# Altium PCB V_4.PcbDoc
Units mm, origin at the board's own origin, x right, y up, seen from the top; angles counter-clockwise.
Board outline 70 x 20 mm, 3 copper layers (Top Layer, GND, Bottom Layer), stack 0.488 mm thick; 4 components, 5 nets, 70 pads, 29 vias.
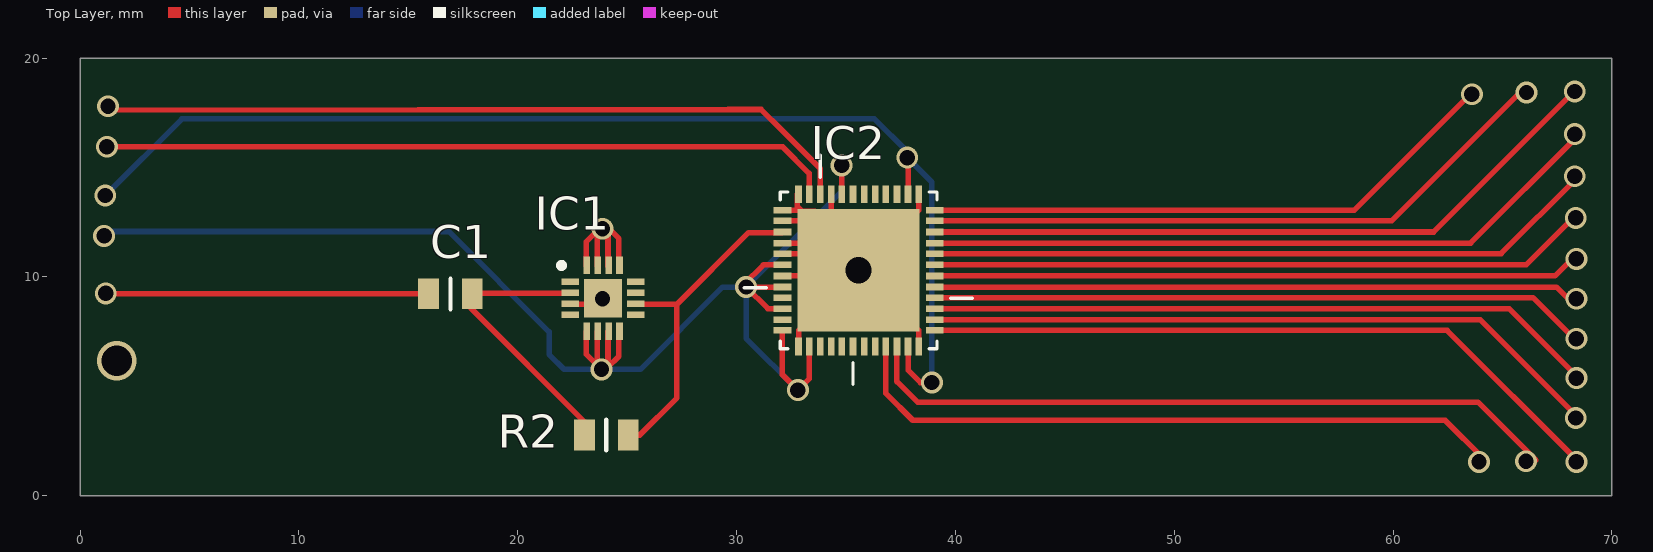
[diagram p0: Top Layer view]
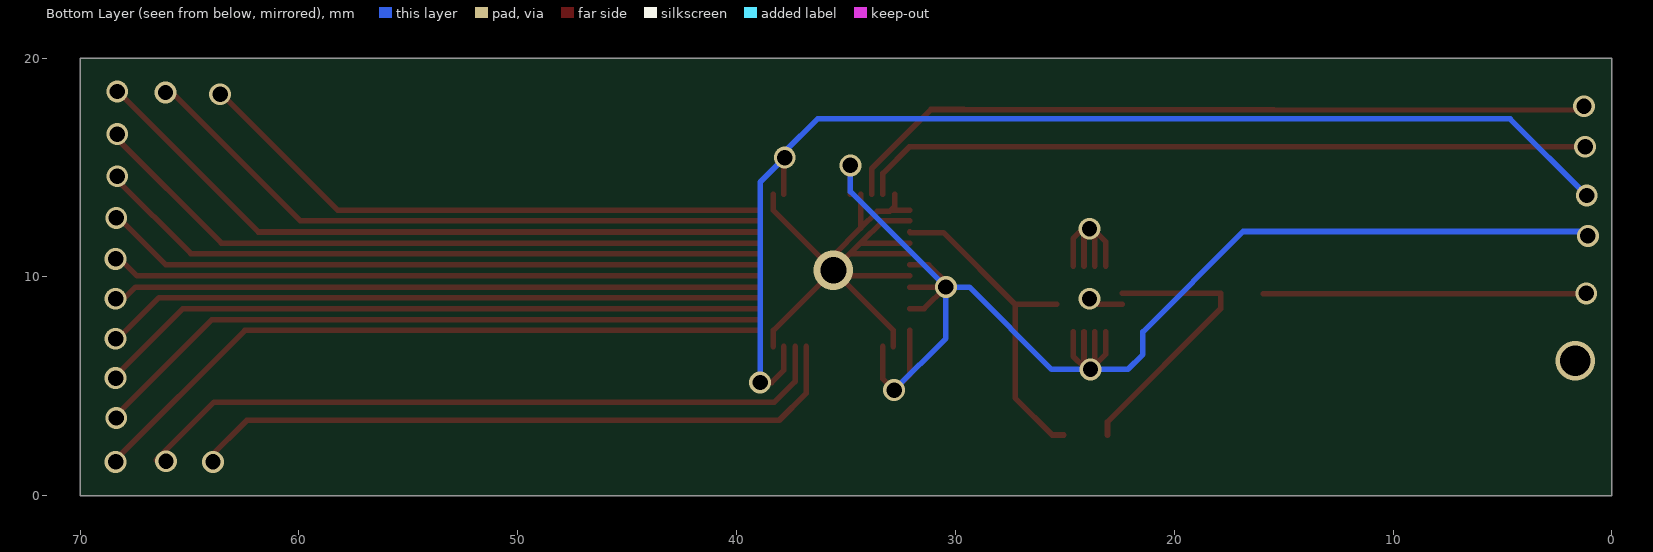
[diagram p1: Bottom Layer view, seen from below]
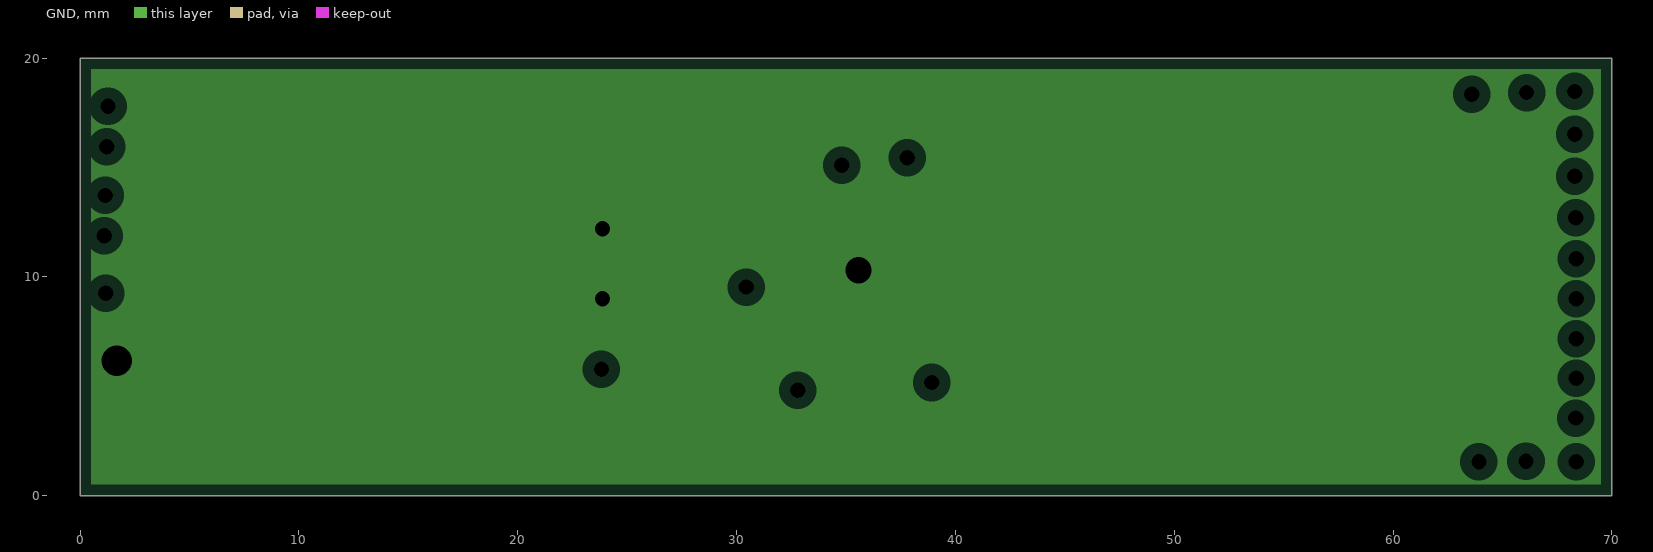
[diagram p2: GND, clearances drawn from the general rule]
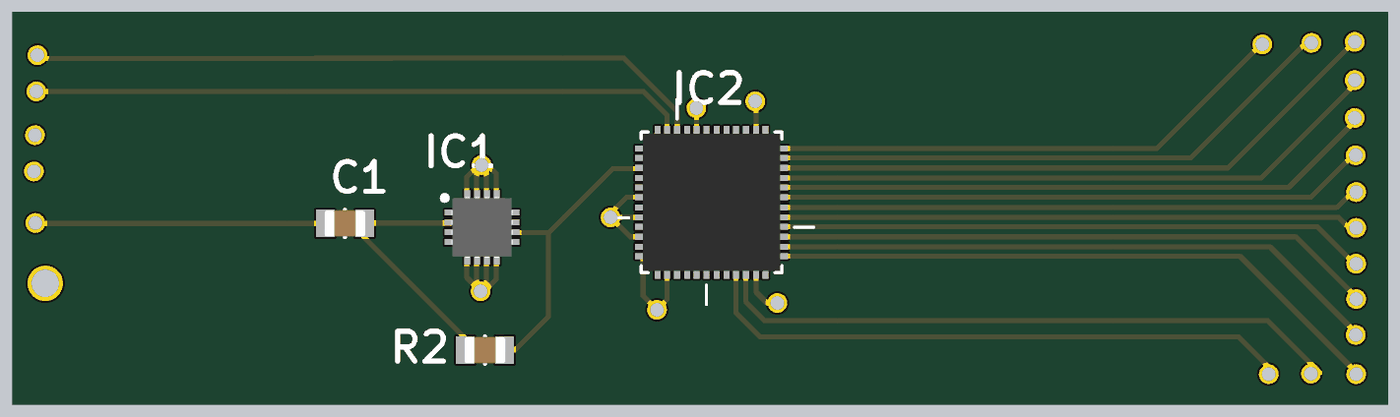
[diagram p3: 3D render of the assembled board from above, using the file's embedded part models]

## Layer stack, top to bottom
Top Solder: solder mask 0.0102, Solder Resist, Dk 3.5
Top Layer: signal copper 0.0356
Dielectric1: core 0.254, FR-4, Dk 4.2
GND: plane copper 0.036, net GND
Dielectric 2: prepreg 0.127, Dk 4.2
Bottom Layer: signal copper 0.0356
Bottom Solder: solder mask 0.0102, Solder Resist, Dk 3.5

## Board outline
0,0 70,0 70,20 0,20

## Design rules (kind name [scope] priority, off if disabled: settings)
Clearance [All] p1: gap=0.254 ignorepadtopadclearanceinfootprint=FALSE except(0: Arc-Hole Track-Hole SMDPad-Hole THPad-Hole Via-Hole Fill-Hole Poly-Hole Region-Hole Text-Hole)
PlaneClearance [All] p1: clearance=0.508
PlaneConnect [All] p1: planeconnectstyle=Relief reliefexpansion=0.508 reliefentries=4 reliefconductorwidth=0.254 reliefairgap=0.254
PolygonConnect [All] p1: connectstyle=Relief reliefconductorwidth=0.254 reliefentries=4 polygonreliefangle="90 Angle" airgapwidth=0.254
RoutingVias [All] p1: holewidth=0.711 width=1.27 viastyle="Through Hole" minholewidth=0.711 minwidth=1.27 maxholewidth=0.711 maxwidth=1.27
SilkToSolderMaskClearance SilkscreenOverComponentPads [IsPad] p1: minsilkscreentomaskgap=0.254 clearancetoexposedcopper=TRUE
SolderMaskExpansion [All] p1: expansion=0.102
Width [All] p1: maxlimit=0.254 minlimit=0.254 preferedwidth=0.254
27 further rules are at their usual default settings.

## Components (designator, comment, footprint, x,y, rotation, side; value= is the part's Value field where it differs from the comment)
C1 "Copasitor" Copasitor 16.35,8.625 r0 top
IC1 "ADA4932" ADA4932 22.376,7.501 r0 top
IC2 "ADS61B49" ADS61b49 35.575,10.3 r270 top
R2 "Resistor" Resistor 23.475,2.175 r0 top

## Footprints (in the part's own frame and the unit in brackets; to place one, negate y for a bottom-side part, rotate by r counter-clockwise, add the part's x,y. Pads: shape width x height; smd on the part's side, far side on the other; paste and mask are expansions set on the pad)
ADA4932 [mm]
  rect 0.8x0.3 smd: 1(0.024,2.274) 2(0.024,1.774) 3(0.024,1.274) 4(0.024,0.774) 9(3.024,0.774) 10(3.024,1.274) 11(3.024,1.774) 12(3.024,2.274)
  rect 0.3x0.8 smd: 5(0.774,0.024) 6(1.274,0.024) 7(1.774,0.024) 8(2.274,0.024) 13(2.274,3.024) 14(1.774,3.024) 15(1.274,3.024) 16(0.774,3.024)
  rect 1.75x1.75 smd: 17(1.524,1.524)
  silkscreen extent -0.5,2.9 -0.25,3.15, body extent -0.03,-0.03 3.07,3.07, height 0.8
ADS61b49 [mil]
  rect 32x12 smd: 1(-137,108) 2(-137,89) 3(-137,69) 4(-137,49) 5(-137,30) 6(-137,10) 7(-137,-10) 8(-137,-30) 9(-137,-49) 10(-137,-69) 11(-137,-89) 12(-137,-108) 25(137,-108) 26(137,-89) 27(137,-69) 28(137,-49) 29(137,-30) 30(137,-10) 31(137,10) 32(137,30) 33(137,49) 34(137,69) 35(137,89) 36(137,108)
  rect 12x32 smd: 13(-108,-137) 14(-89,-137) 15(-69,-137) 16(-49,-137) 17(-30,-137) 18(-10,-137) 19(10,-137) 20(30,-137) 21(49,-137) 22(69,-137) 23(89,-137) 24(108,-137) 37(108,137) 38(89,137) 39(69,137) 40(49,137) 41(30,137) 42(10,137) 43(-10,137) 44(-30,137) 45(-49,137) 46(-69,137) 47(-89,137) 48(-108,137)
  rect 220x220 smd: 49(0,0)
  silkscreen extent -207,-206 205,205, body extent -138,-138 138,138, height 39
Copasitor [mm] "0805"
  rect 0.95x1.4 smd: 1(-0.425,0.6) 2(1.575,0.6)
  silkscreen extent 0.58,-0.1 0.58,1.3, body extent -0.47,-0.07 1.63,1.28, height 0.9
Resistor [mm] "0805"
  rect 0.95x1.4 smd: 1(-0.425,0.6) 2(1.575,0.6)
  silkscreen extent 0.58,-0.1 0.58,1.3, body extent -0.47,-0.07 1.63,1.28, height 0.9

## Part data
IC2: library part ADS61b49

## Via types
v1: diameter 1, hole 0.7, Top Layer to Bottom Layer, 27 vias
v2: diameter 1.8, hole 1.4, Top Layer to Bottom Layer, 1 vias
v3: diameter 1.8, hole 1.2, Top Layer to Bottom Layer, 1 vias

## Nets (pads, with @x,y where several pads share a name; then routed paths per layer and width w, separated by ;. In a path a pad name is that pad's centre, name@x,y a point inside that pad or via, vN(x,y) a via of type N, cw(c..) or ccw(c..) an arc to the next point about the centre after c; other vN are vias at no path point)
+1.8: IC2.2 IC2.35 | length 53.8
  Top Layer w0.254: v1(37.8,15.45) 37.836,15.414 IC2.2 ; IC2.35 37.836,5.739 38.4,5.175 v1(38.925,5.175)
  Bottom Layer w0.254: v1(1.15,13.725) 4.65,17.225 36.3,17.225 37.8,15.725 v1(37.8,15.45) 38.925,14.325 v1(38.925,5.175)
+3.3: IC1.6 IC1.7 IC1.8 IC2.8 IC2.18 IC2.20 IC2.22 IC2.24 IC2.26 | length 67.2
  Top Layer w0.254: 23.125,7.5 23.125,6.475 v1@23.625,5.975 ; IC1.6@23.625,7.5 v1@23.625,5.975 ; IC1.7@24.125,7.5 v1@24.125,5.875 ; IC1.8@24.625,7.5 24.625,6.375 v1@24.125,5.875 ; IC2.24 32.095,5.53 v1(32.8,4.825) 33.314,5.339 IC2.26 ; IC2.22 31.428,8.547 v1(30.437,9.538) ; IC2.20 v1(30.437,9.538) ; IC2.18 31.229,10.554 30.325,9.65 v1(30.437,9.538) ; v1(34.8,15.1) 34.813,15.087 IC2.8 ; v1@23.625,5.975 v1(23.825,5.775) 23.925,5.675 v1@24.125,5.875
  Bottom Layer w0.254: v1@1.125,12.075 16.85,12.075 21.438,7.487 21.438,6.462 22.125,5.775 v1(23.825,5.775) 25.6,5.775 29.363,9.538 v1(30.437,9.538) ; v1(32.8,4.825) 30.437,7.188 v1(30.437,9.538) ; v1(34.8,15.1) 34.8,13.901 v1(30.437,9.538)
  other v1: 1.1,11.875
GND: IC1.3 IC1.13 IC1.14 IC1.15 IC1.16 IC1.17 IC2.1 IC2.9 IC2.12 IC2.13 IC2.14 IC2.16 IC2.17 IC2.19 IC2.25 IC2.36 IC2.49 | length 42.5
  Top Layer w0.254: IC1.3@22.375,8.75 23.625,8.75 v1(23.875,9) ; IC1.16@23.125,10.5 23.125,11.6 23.625,12.1 IC1.15@23.625,10.5 ; IC1.14@24.125,10.5 24.125,12.25 24.625,11.75 IC1.13@24.625,10.5 ; IC2.19 IC2.49@35.321,10.046 ; IC2.17 IC2.49@34.813,11.062 ; IC2.16 IC2.49@34.33,11.545 ; IC2.14 33.314,12.561 IC2.49@34.33,11.545 ; IC2.13 IC2.49@32.953,13.043 ; IC2.12@32.781,13.78 32.781,13.216 IC2.49@32.953,13.043 ; IC2.25 32.832,7.557 IC2.49@35.321,10.046 ; IC2.9 IC2.49@34.33,12.23 ; IC2.36 38.318,7.557 v3(35.575,10.3) ; IC2.1 38.318,13.043 v3(35.575,10.3) ; IC2.49@32.953,13.043 33.004,12.992 33.568,12.992 IC2.49@34.33,12.23 ; IC2.49@34.33,11.545 IC2.49@34.813,11.062 ; IC2.49@34.33,12.23 35.575,10.986 v3(35.575,10.3) ; IC2.49@34.813,11.062 v3(35.575,10.3) ; IC2.49@35.321,10.046 v3(35.575,10.3)
  other v1: 23.875,12.2
  other v2: 1.675,6.175
NetC1_2: C1.2 IC1.2 R2.1 | length 13.1
  Top Layer w0.254: IC1.2@22.375,9.25 17.875,9.25 17.875,8.55 23.05,3.375 R2.1
NetIC1_10: IC1.10 IC2.15 R2.2 | length 15.3
  Top Layer w0.254: R2.2 25.575,2.775 27.275,4.475 27.275,8.75 ; IC1.10@25.375,8.75 27.275,8.75 ; IC2.15 32.068,12.025 30.55,12.025 27.275,8.75
pads on no net: C1.1 IC1.1 IC1.4 IC1.5 IC1.9 IC1.11 IC1.12 IC2.3 IC2.4 IC2.5 IC2.6 IC2.7 IC2.10 IC2.11 IC2.21 IC2.23 IC2.27 IC2.28 IC2.29 IC2.30 IC2.31 IC2.32 IC2.33 IC2.34 IC2.37 IC2.38 IC2.39 IC2.40 IC2.41 IC2.42 IC2.43 IC2.44 IC2.45 IC2.46 IC2.47 IC2.48
copper on no net: | length 509.7
  Top Layer w0.254: v1@1.175,9.225 15.925,9.225 ; v1(1.175,9.25) v1@1.2,9.225 ; v1@1.175,17.625 29.625,17.65 31.125,17.65 32.05,16.725 33.822,14.953 33.822,13.78 ; v1(1.225,15.95) 30.6,15.95 32.1,15.95 33.314,14.736 33.314,13.78 ; 36.82,6.82 36.82,4.68 38.05,3.45 62.375,3.45 v1@64.125,1.7 ; 37.328,6.82 37.328,5.222 38.275,4.275 63.875,4.275 v1@66.525,1.625 ; 39.055,7.557 62.468,7.557 v1@68.425,1.6 ; 39.055,8.039 63.986,8.039 v1@68.425,3.6 ; 39.055,8.547 65.303,8.547 v1@68.45,5.4 ; 39.055,9.055 66.395,9.055 v1@68.475,6.975 ; 39.055,9.538 67.462,9.538 v1@68.15,8.85 ; 39.055,10.046 67.396,10.046 v1@68.175,10.825 ; 39.055,10.554 66.079,10.554 v1@68.175,12.65 ; 39.055,11.062 64.937,11.062 v1@68.35,14.475 ; 39.055,11.545 63.545,11.545 v1@68.45,16.45 ; 39.055,12.053 61.853,12.053 v1@68.425,18.625 ; 39.055,12.561 59.936,12.561 v1@66.025,18.65 ; 39.055,13.043 58.218,13.043 v1@63.713,18.538
  other v1: 63.925,1.55 68.375,1.55 66.075,1.575 68.35,3.55 68.375,5.375 68.375,7.175 68.375,9 68.375,10.825 68.35,12.7 68.3,14.6 68.3,16.525 1.275,17.8 63.6,18.35 66.1,18.425 68.3,18.475

## Polygon pours and split planes (outlines as drawn)
GND on GND (split plane): 69.49,19.49 69.49,0.51 0.51,0.51 0.51,19.49